# Altium PCB wificar.PcbDoc (part 1 of 3)
Units mil, origin at the board's own origin, x right, y up, seen from the top; angles counter-clockwise.
Board outline 3940.12 x 3943.17 mil, 2 copper layers (Top Layer, Bottom Layer); 89 components, 114 nets, 455 pads, 176 vias.
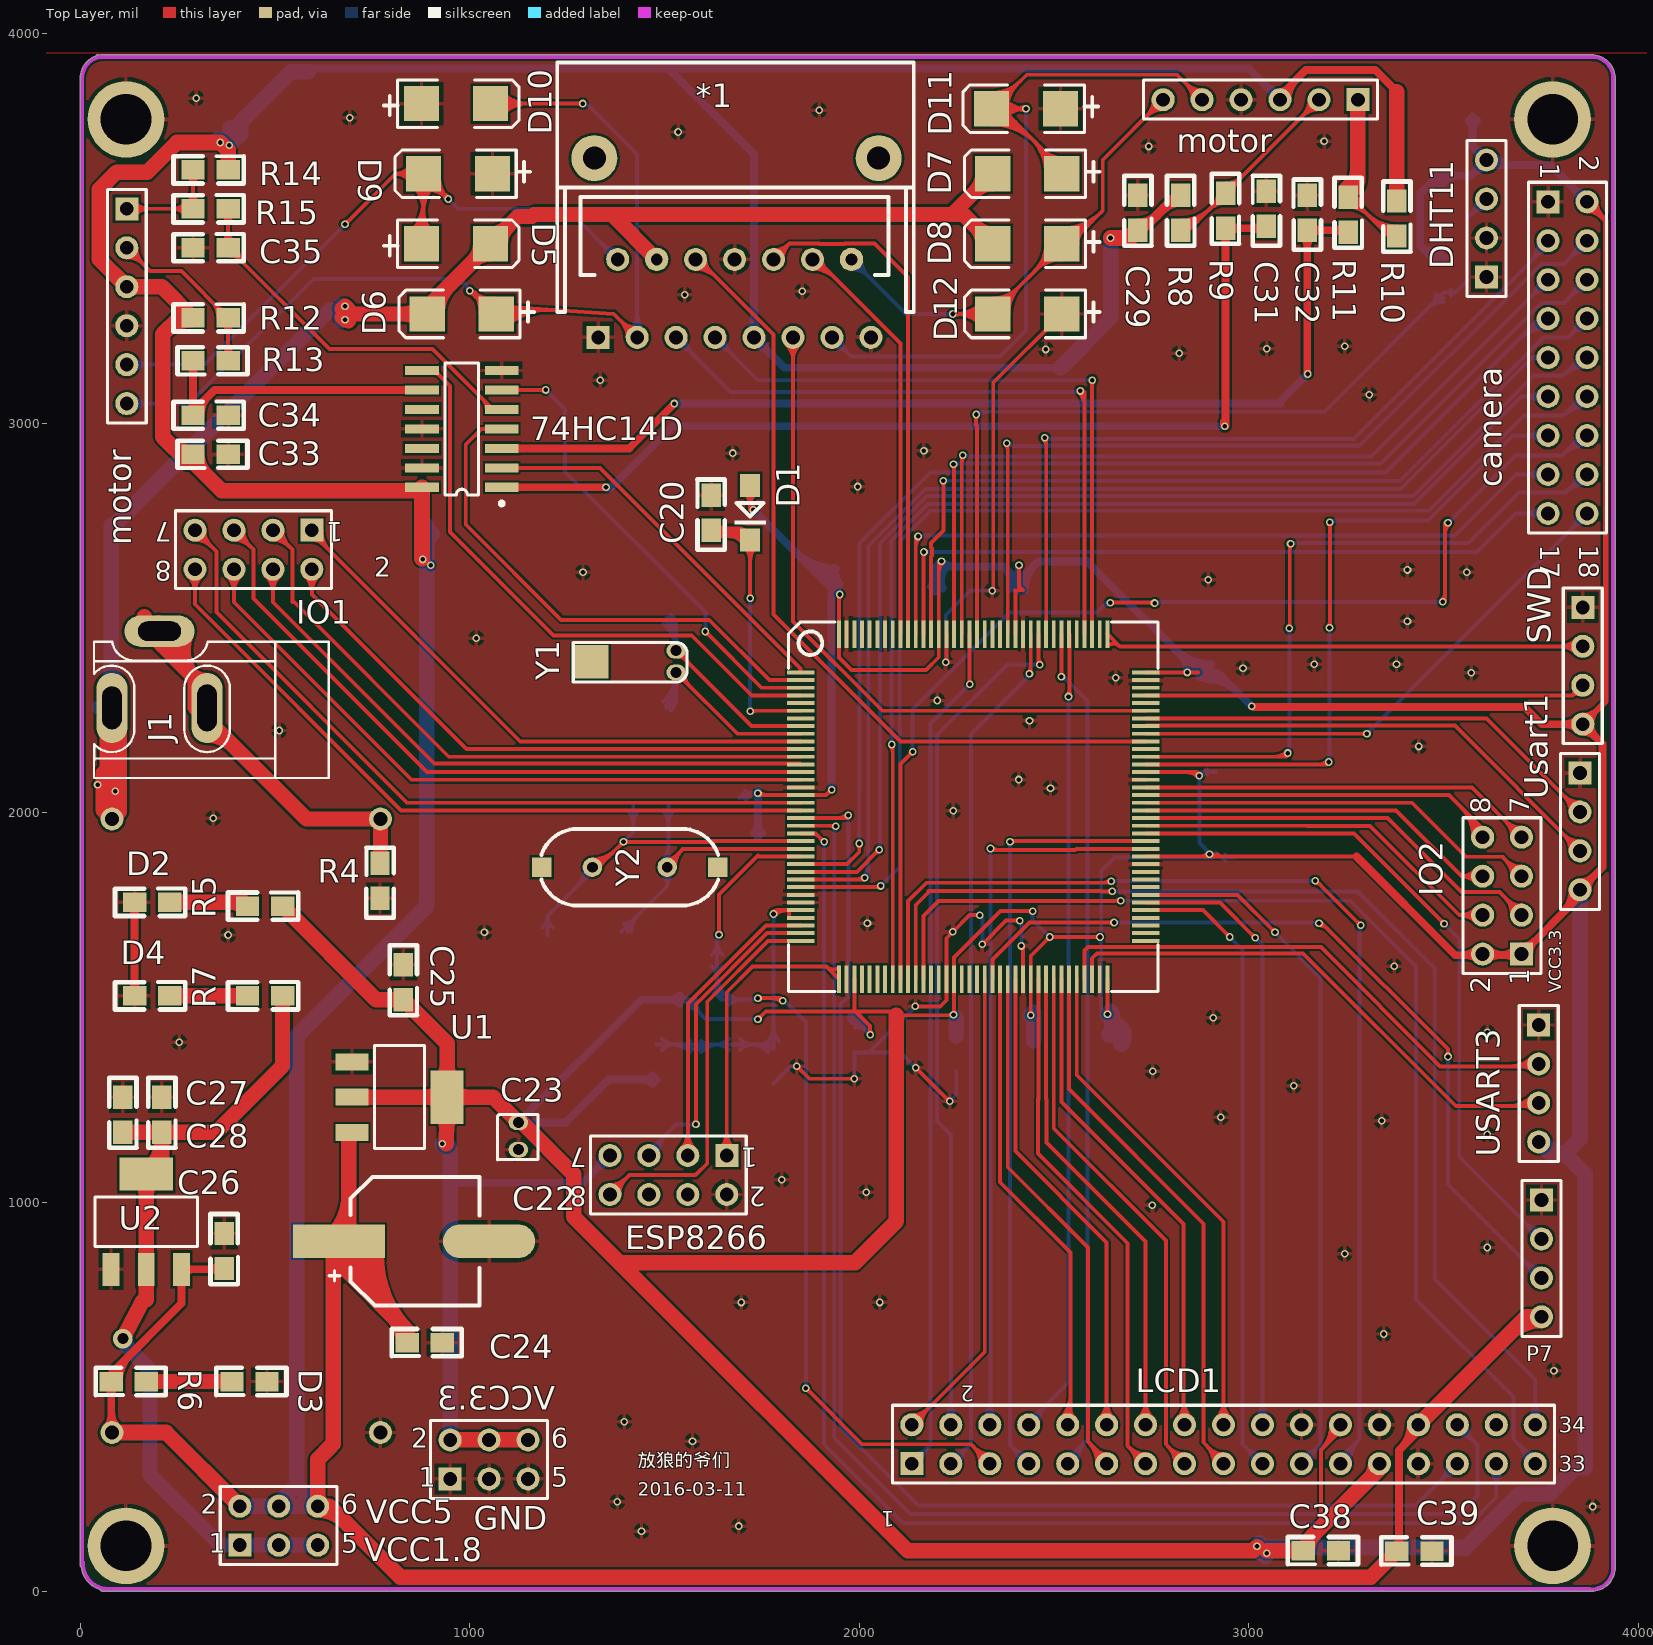
[diagram p0: Top Layer view]
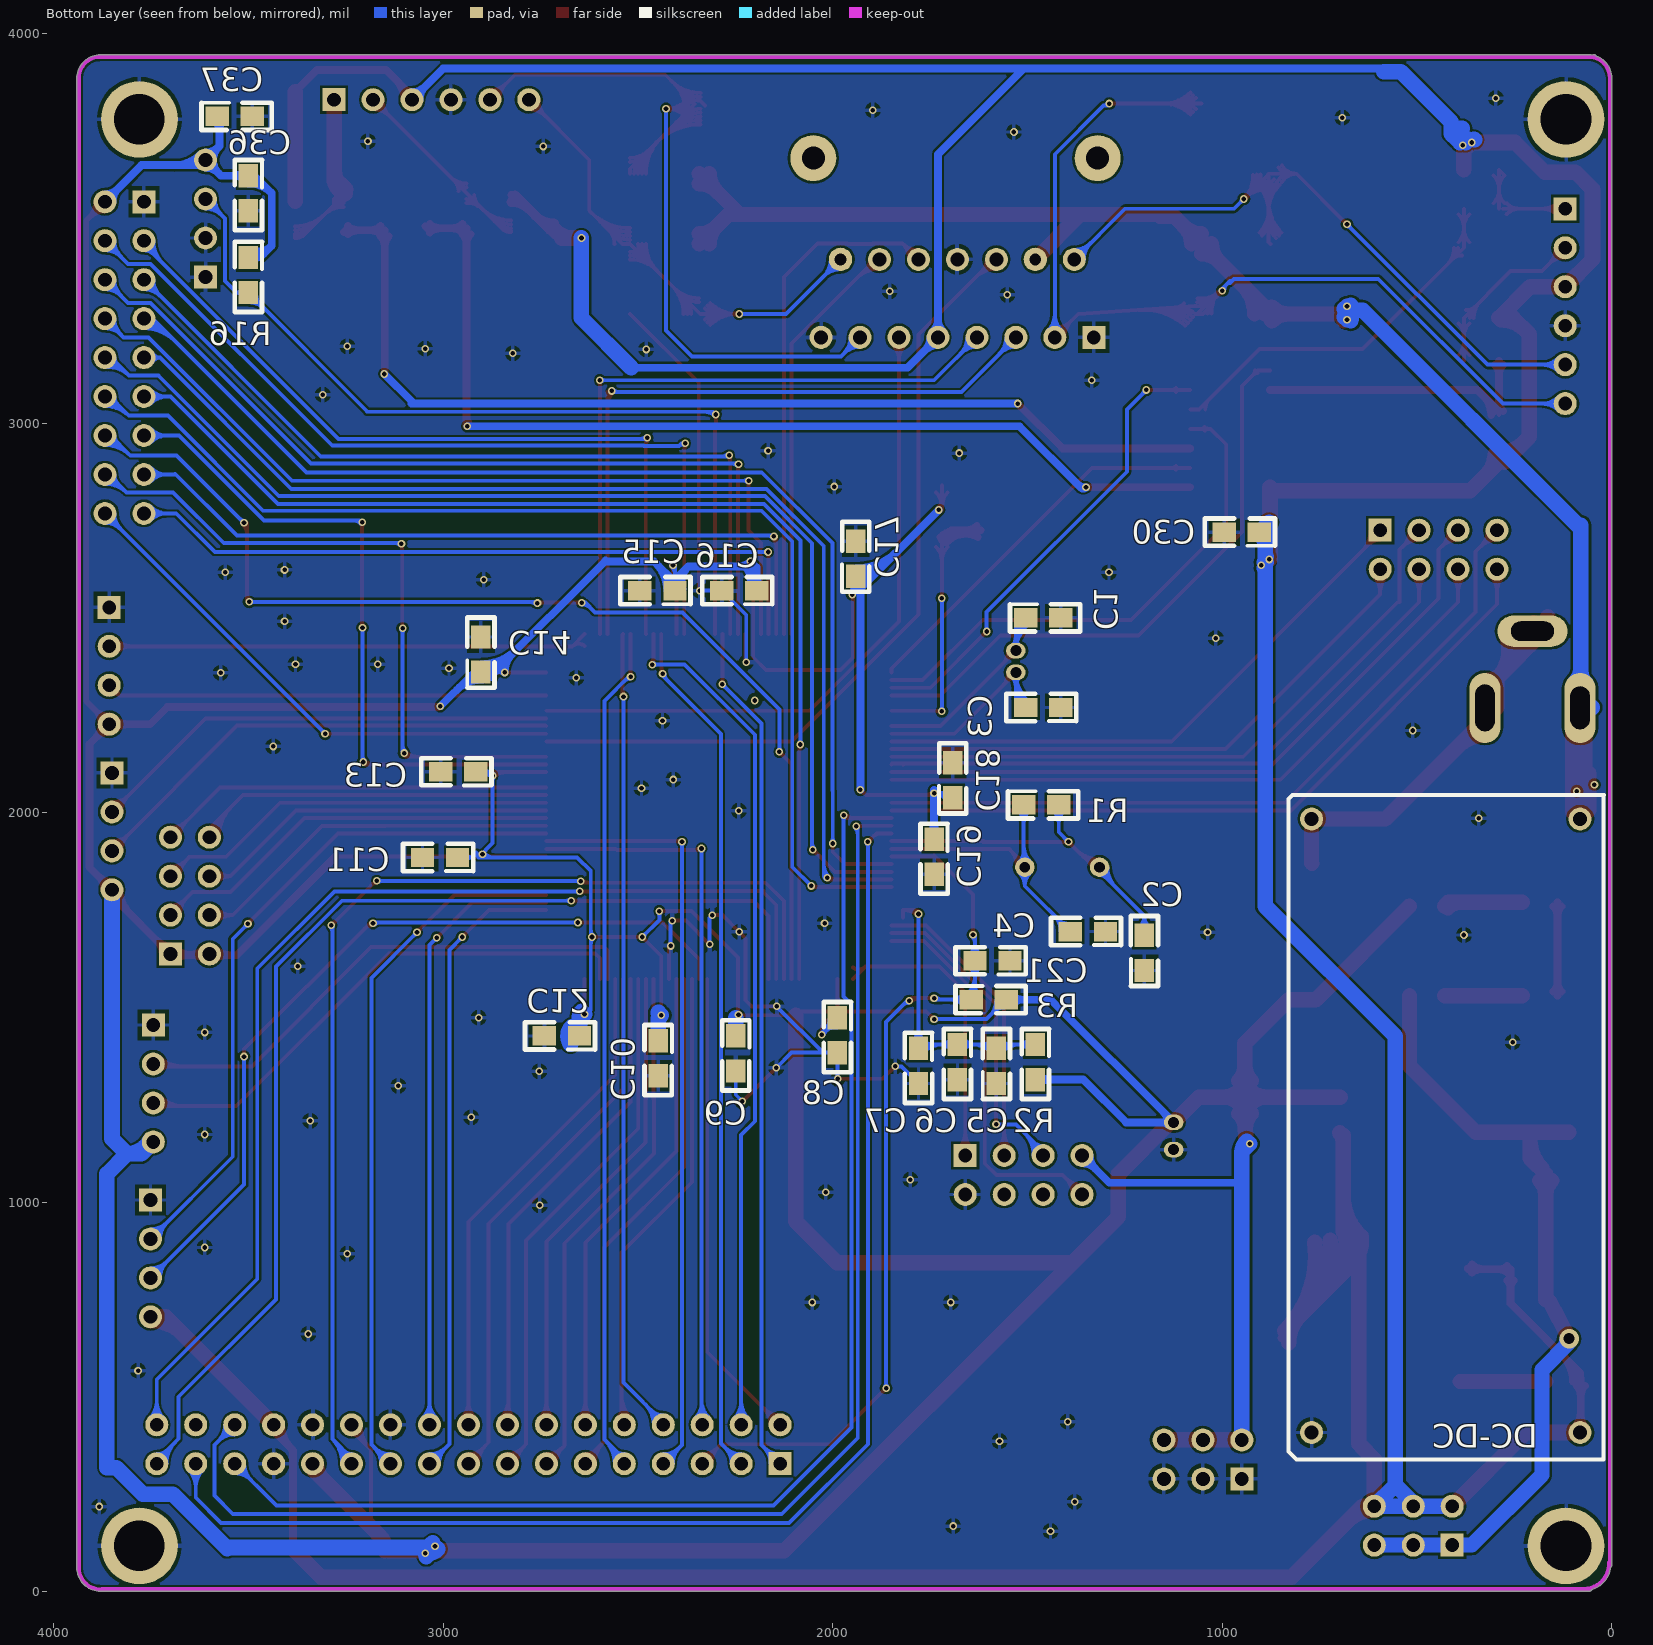
[diagram p1: Bottom Layer view, seen from below]

## Layer stack, top to bottom
Top Layer: signal copper 1.4
Dielectric: dielectric 12.6, FR-4, Dk 4.8
Bottom Layer: signal copper 1.4

## Board outline
-0.03,69 -0.03,3884.06 cw(c4.98,3884.06) 0.38,3886.05 cw(c60.46,3885.36) 40.39,3941.99 cw(c45,3940.02) 45,3945.03 46.4,3945.03 cw(c46.4,3940.02) 48.95,3944.33 cw(c60.46,3885.36) 53.1,3944.99 cw(c53.71,3940.02) 53.71,3945.03 3880,3945.03 cw(c3880,3884.94) 3940.09,3884.94 cw(c3935.07,3884.94) 3939.87,3883.49 cw(c3935.01,3882.27) 3940.02,3882.27 cw(c3935.01,3882.27) 3940.02,3882.27 cw(c3935.02,3882) 3940.03,3882 3940.03,61.86 cw(c3935.02,61.86) 3940.03,61.81 ccw(c3879.94,61.86) 3940.03,61.86 3940.03,61.81 cw(c3879.94,61.86) 3874.91,1.98 57,1.98 cw(c57,7) 52.09,5.98 cw(c71.42,71.78) 3.25,64.29 cw(c4.98,69)

## Design rules (kind name [scope] priority, off if disabled: settings)
Clearance [All] p1: gap=6
HoleSize [All] p1: absolutevalues=TRUE maxlimit=196.85 minlimit=0 maxpercent=80.000 minpercent=20.000
MinimumSolderMaskSliver [All] p1: minsoldermaskwidth=1
PolygonConnect [All] p1: connectstyle=Relief reliefconductorwidth=10 reliefentries=4 polygonreliefangle="90 Angle" airgapwidth=10
RoutingVias [All] p1: holewidth=11.81 width=19.68 viastyle="Through Hole" minholewidth=11.81 minwidth=19.68 maxholewidth=11.81 maxwidth=19.68
SilkToSilkClearance [All] p1: silktosilkclearance=0
SilkToSolderMaskClearance [IsPad] p1: minsilkscreentomaskgap=0 clearancetoexposedcopper=TRUE
SolderMaskExpansion [All] p1: expansion=4
Width Width_signal [All] p1: maxlimit=40 minlimit=6 preferedwidth=10
Width Width_12V [InNet('VCC_BT')] p2: maxlimit=40 minlimit=10 preferedwidth=20
Width Width_VCC3.3 [InNet('VCC3.3')] p3: maxlimit=20 minlimit=10 preferedwidth=15
Width Width_GND [InNet('GND')] p4: maxlimit=20 minlimit=10 preferedwidth=15
Width Width_VCC5 [InNet('VCC5')] p5: maxlimit=40 minlimit=10 preferedwidth=15
24 further rules are at their usual default settings.

## Classes and differential pairs
component class MotorDrive: 74HC14D *1 C29 C30 C31 C32 C33 C34 C35 D5 D6 D7 D8 D9 D10 D11 D12 motor R8 R9 R10 R11 R12 R13 R14 R15
component class MCUSTM32F4ZGT6: C1 C2 C3 C4 C5 C6 C7 C8 C9 C10 C11 C12 C13 C14 C15 C16 C17 C18 C19 C20 C21 D1 IO1 IO2 R1 R2 R3 SWD Usart1 USART3 Y1 Y2
component class BayPower: C22 C23 C24 C25 C26 C27 C28 D2 D3 D4 J1 R4 R5 R6 R7 U1 U2 VCC3.3 VCC5
component class baymaxother: C36 C37 C38 C39 camera DHT11 ESP8266 LCD1 P7 R16

## Components (designator, comment, footprint, x,y, rotation, side; value= is the part's Value field where it differs from the comment)
74HC14D "74HC14D" SO14-150 980,2985 r90 top (schematic designator U3)
*1 "L298N" L298N散热片 2060,3680 r270 top
C1 "10" "0805-bottom layer" 1500,2500 r180 top
C2 "22" "0805-bottom layer" 1200,1600 r90 top
C3 "10" "0805-bottom layer" 1420,2270 r0 top
C4 "22" "0805-bottom layer" 1305,1695 r0 top
C5 "225" "0805-bottom layer" 1580,1310 r90 top
C6 "104" "0805-bottom layer" 1680,1400 r270 top
C7 "10uF" "0805-bottom layer" 1780,1390 r270 top
C8 "104" "0805-bottom layer" 1988,1469 r270 top
C9 "104" "0805-bottom layer" 2249,1422 r270 top
C10 "104" "0805-bottom layer" 2448,1410 r270 top
C11 "104" "0805-bottom layer" 2968,1885 r0 top
C12 "104" "0805-bottom layer" 2655,1427 r0 top
C13 "104" "0805-bottom layer" 2921,2105 r0 top
C14 "104" "0805-bottom layer" 2903,2366 r90 top
C15 "104" "0805-bottom layer" 2410,2570 r0 top
C16 "104" "0805-bottom layer" 2200,2570 r0 top
C17 "104" "0805-bottom layer" 1941,2612 r90 top
C18 "104" "0805-bottom layer" 1692,2043 r90 top
C19 "104" "0805-bottom layer" 1740,1926.95 r270 top
C20 "104" "0805 - duplicate" 1620,2815 r270 top
C21 "104" "0805-bottom layer" 1550,1620 r0 top
C22 "220uF/35V" CAPPR-8.3X8.3-SM-F 860,900 r180 top
C23 "10uF/25V" 10UF/25v 1100,1200 r0 top
C24 "104" "0805 - duplicate" 840,640 r0 top
C25 "104" "0805 - duplicate" 830,1520 r90 top
C26 "104" "0805 - duplicate" 370,830 r90 top
C27 "104" "0805 - duplicate" 110,1180 r90 top
C28 "10uF" "0805 - duplicate" 210,1180 r90 top
C29 "0.1uF" "0805 - duplicate" 2715,3495 r90 top
C30 "0.1uF" "0805-bottom layer" 910,2720 r0 top
C31 "100pF" "0805 - duplicate" 3045,3595 r270 top
C32 "100pF" "0805 - duplicate" 3150,3585 r270 top
C33 "0.1uF" "0805 - duplicate" 290,2920 r0 top
C34 "100pF" "0805 - duplicate" 380,3020 r180 top
C35 "100pF" "0805 - duplicate" 380,3449.94 r180 top
C36 "104" "0805-bottom layer" 3500,3630 r270 top
C37 "104" "0805-bottom layer" 3575,3787 r180 top
C38 "104" "0805 - duplicate" 3140,106 r0 top
C39 "104" "0805 - duplicate" 3380,105 r0 top
camera "Header 9X2" HDR2X9 3768,3568 r270 top (schematic designator P8)
D1 "1N4148" DIODE_SOP 1720,2840 r270 top
D2 "LED-R" "0805 - duplicate" 230,1770 r180 top
D3 "LED-R" "0805 - duplicate" 390,540 r0 top
D4 "LED-R" "0805 - duplicate" 230,1530 r180 top
D5 "SS34" SMB 965,3460 r0 top
D6 "SS34" SMB 980,3280 r180 top
D7 "SS34" SMB 2431.42,3640 r180 top
D8 "SS34" SMB 2431.42,3460 r180 top
D9 "SS34" SMB 970,3640 r180 top
D10 "SS34" SMB 965,3820 r0 top
D11 "SS34" SMB 2428,3807 r180 top
D12 "SS34" SMB 2431.42,3280 r180 top
DHT11 "Header 4" HDR1X4 3610,3375 r90 top (schematic designator P4)
ESP8266 "Header 4X2" HDR2X4#1 1660,1120 r180 top (schematic designator P6)
IO1 "Header 4X2" HDR2X4#2 595,2725 r180 top (schematic designator P1)
IO2 "Header 4X2" HDR2X4#1 3700,1637 r90 top (schematic designator P2)
J1 "PWR" DC10B 501,2439 r180 top
LCD1 "TFT_LCD" HDR2X17 2135,329 r0 top
MCU1 "STM32F103ZET6" LQFP144 1850,2360 r0 top
motor "Moter_R" HDR1X6 120,3549.94 r270 top (schematic designator JP5)
motor "Motor_L" HDR1X6 3280,3830 r180 top (schematic designator JP4)
P7 "MHDR1X4" HDR1X4 3751,1006 r270 top
R1 "1M" "0805-bottom layer" 1505,2020 r180 top
R2 "10R" "0805-bottom layer" 1480,1400 r270 top
R3 "10K" "0805-bottom layer" 1640,1520 r180 top
R4 "1M" "0805 - duplicate" 770,1870 r270 top
R5 "470R" "0805 - duplicate" 520,1760 r180 top
R6 "470R" "0805 - duplicate" 80,540 r0 top
R7 "470R" "0805 - duplicate" 520,1530 r180 top
R8 "10K" "0805 - duplicate" 2825,3495 r90 top
R9 "240R" "0805 - duplicate" 2940,3500 r90 top
R10 "10K" "0805 - duplicate" 3380,3480 r90 top
R11 "240R" "0805 - duplicate" 3255,3490 r90 top
R12 "10K" "0805 - duplicate" 380,3270 r180 top
R13 "240R" "0805 - duplicate" 290,3160 r0 top
R14 "10K" "0805 - duplicate" 380,3649.94 r180 top
R15 "240R" "0805 - duplicate" 380,3549.94 r180 top
R16 "4.7K" "0805-bottom layer" 3500,3420 r270 top
SWD "SWD" HDR1X4 3857,2527 r270 top (schematic designator JP1)
U1 "AMS1117" SOT-223 820,1270 r270 top
U2 "AMS1117.1.8" SOT-223 170,950 r0 top
Usart1 "SWD" HDR1X4 3850,2102 r270 top (schematic designator JP3)
USART3 "Usart3" HDR1X4 3744,1455 r270 top (schematic designator JP2)
VCC3.3 "MHDR2X3" HDR2X3 950,290 r0 top (schematic designator PIO1)
VCC5 "MHDR2X3" HDR2X3 410,120 r0 top (schematic designator PIO2)
Y1 "32.768K" XTAL32 1530,2360 r180 top
Y2 "8MHZ" XTAL_US 1315,1860 r0 top

## Footprints (in the part's own frame and the unit in brackets; to place one, negate y for a bottom-side part, rotate by r counter-clockwise, add the part's x,y. Pads: shape width x height; smd on the part's side, far side on the other; paste and mask are expansions set on the pad)
10UF/25v [mil]
  oval 50x40 hole 28: 1(25,5) 2(25,-65)
  silkscreen extent -28,-91 75,25
"0805 - duplicate" [mil]
  rect 60x50 smd: 1(0,-0.06) 2(90,-0.06)
  silkscreen extent -40,-35 140,35
"0805-bottom layer" [mil]
  rect 60x50 smd far side: 1(-5,-0.06) 2(85,-0.06)
CAPPR-8.3X8.3-SM-F [mm]
  rect 6x2.2 smd: 1(4.953,0)
  oval 6x2.2 smd: 2(-4.826,0)
  silkscreen extent -4.2,-4.2 5.6,4.2, body extent -4.95,-4.19 4.95,4.11, height 10.2
DC10B [mil]
  oval 80x180 hole 50 slot 110 at 90 deg: 1(419.09,170)
  oval 80x180 hole 50 slot 120 at 90 deg: 2(175,170)
  oval 180x80 hole 50 slot 110 at 0 deg: 3(297.05,-26.85)
  silkscreen extent -138,0 465,350
DIODE_SOP [mm]
  rect 1.5x1.3 smd: 1(0,0) 2(3.556,0)
  silkscreen extent 1.14,-1.01 2.56,1.02
HDR1X4 [mm] "Connector; Header; 4 Position"
  rect 1.5x1.5 hole 0.9: 1(0,0)
  round 1.5 hole 0.9: 2(2.54,0) 3(5.08,0) 4(7.62,0)
  silkscreen extent -1.27,-1.27 8.89,1.27
HDR1X6 [mm]
  rect 1.5x1.5 hole 0.9: 1(0,0)
  round 1.5 hole 0.9: 2(2.54,0) 3(5.08,0) 4(7.62,0) 5(10.16,0) 6(12.7,0)
  silkscreen extent -1.27,-1.27 13.97,1.27
HDR2X3 [mm] "Connector; Header; 3x2 Position"
  rect 1.5x1.5 hole 0.9: 1(0,0)
  round 1.5 hole 0.9: 2(0,2.54) 3(2.54,0) 4(2.54,2.54) 5(5.08,0) 6(5.08,2.54)
  silkscreen extent -1.27,-1.27 6.35,3.81
HDR2X4#1 [mm] "Connector; Header; 4x2 Position"
  rect 1.5x1.5 hole 0.9: 1(0,0)
  round 1.5 hole 0.9: 2(0,2.54) 3(2.54,0) 4(2.54,2.54) 5(5.08,0) 6(5.08,2.54) 7(7.62,0) 8(7.62,2.54)
  silkscreen extent -1.27,-1.27 8.89,3.81
HDR2X4#2 [mm] "Connector; Header; 4x2 Position"
  rect 1.5x1.5 hole 0.9: 1(0,0)
  round 1.5 hole 0.9 paste+0: 2(0,2.54)
  round 1.5 hole 0.9: 3(2.54,0) 4(2.54,2.54) 5(5.08,0) 6(5.08,2.54) 7(7.62,0) 8(7.62,2.54)
  silkscreen extent -1.27,-1.27 8.89,3.81
HDR2X9 [mm] "Connector; Header; 9x2 Position"
  rect 1.5x1.5 hole 0.9: 1(0,0)
  round 1.5 hole 0.9: 2(0,2.54) 3(2.54,0) 4(2.54,2.54) 5(5.08,0) 6(5.08,2.54) 7(7.62,0) 8(7.62,2.54) 9(10.16,0) 10(10.16,2.54) 11(12.7,0) 12(12.7,2.54) 13(15.24,0) 14(15.24,2.54) 15(17.78,0) 16(17.78,2.54) 17(20.32,0) 18(20.32,2.54)
  silkscreen extent -1.27,-1.27 21.59,3.81
HDR2X17 [mm] "Connector; Header; 17x2 Position"
  rect 1.5x1.5 hole 0.9: 1(0,0)
  round 1.5 hole 0.9: 2(0,2.54) 3(2.54,0) 4(2.54,2.54) 5(5.08,0) 6(5.08,2.54) 7(7.62,0) 8(7.62,2.54) 9(10.16,0) 10(10.16,2.54) 11(12.7,0) 12(12.7,2.54) 13(15.24,0) 14(15.24,2.54) 15(17.78,0) 16(17.78,2.54) 17(20.32,0) 18(20.32,2.54) 19(22.86,0) 20(22.86,2.54) 21(25.4,0) 22(25.4,2.54) 23(27.94,0) 24(27.94,2.54) 25(30.48,0) 26(30.48,2.54) 27(33.02,0) 28(33.02,2.54) 29(35.56,0) 30(35.56,2.54) 31(38.1,0) 32(38.1,2.54) 33(40.64,0) 34(40.64,2.54)
  silkscreen extent -1.27,-1.27 41.91,3.81
L298N散热片 [mm]
  round 3 hole 1.5: 0(0,-0.254) 0(0,-18.796)
  rect 1.5x1.5 hole 0.9: 1(11.684,-18.542)
  round 1.5 hole 0.9: 2(6.604,-17.272) 3(11.684,-16.002) 5(11.684,-13.462) 6(6.604,-12.192) 7(11.684,-10.922) 8(6.604,-9.652) 9(11.684,-8.382) 10(6.604,-7.112) 11(11.684,-5.842) 12(6.604,-4.572) 13(11.684,-3.302) 15(11.684,-0.762)
  round 1.524 hole 0.762: 4(6.604,-14.732) 14(6.604,-2.032)
  silkscreen extent -6.22,-21.21 10.03,2.03
LQFP144 [mil]
  rect 70.87x10 smd: 1(-0.35,0.02) 2(-0.35,-19.66) 3(-0.35,-39.35) 4(-0.35,-59.03) 5(-0.35,-78.72) 6(-0.35,-98.4) 7(-0.35,-118.09) 8(-0.35,-137.77) 9(-0.35,-157.46) 10(-0.35,-177.14) 11(-0.35,-196.83) 12(-0.35,-216.51) 13(-0.35,-236.2) 14(-0.35,-255.88) 15(-0.35,-275.57) 16(-0.35,-295.25) 17(-0.35,-314.94) 18(-0.35,-334.62) 19(-0.35,-354.31) 20(-0.35,-373.99) 21(-0.35,-393.68) 22(-0.35,-413.36) 23(-0.35,-433.05) 24(-0.35,-452.73) 25(-0.35,-472.42) 26(-0.35,-492.1) 27(-0.35,-511.79) 28(-0.35,-531.47) 29(-0.35,-551.16) 30(-0.35,-570.84) 31(-0.35,-590.53) 32(-0.35,-610.21) 33(-0.35,-629.9) 34(-0.35,-649.58) 35(-0.35,-669.27) 36(-0.35,-688.95) 73(885.47,-688.95) 74(885.47,-669.27) 75(885.47,-649.58) 76(885.47,-629.9) 77(885.47,-610.21) 78(885.47,-590.53) 79(885.47,-570.84) 80(885.47,-551.16) 81(885.47,-531.47) 82(885.47,-511.79) 83(885.47,-492.1) 84(885.47,-472.42) 85(885.47,-452.73) 86(885.47,-433.05) 87(885.47,-413.36) 88(885.47,-393.68) 89(885.47,-373.99) 90(885.47,-354.31) 91(885.47,-334.62) 92(885.47,-314.94) 93(885.47,-295.25) 94(885.47,-275.57) 95(885.47,-255.88) 96(885.47,-236.2) 97(885.47,-216.51) 98(885.47,-196.83) 99(885.47,-177.14) 100(885.47,-157.46) 101(885.47,-137.77) 102(885.47,-118.09) 103(885.47,-98.4) 104(885.47,-78.72) 105(885.47,-59.03) 106(885.47,-39.35) 107(885.47,-19.66) 108(885.47,0.02)
  rect 10x70.87 smd: 37(98.07,-787.38) 38(117.76,-787.38) 39(137.44,-787.38) 40(157.13,-787.38) 41(176.81,-787.38) 42(196.5,-787.38) 43(216.18,-787.38) 44(235.87,-787.38) 45(255.55,-787.38) 46(275.24,-787.38) 47(294.92,-787.38) 48(314.61,-787.38) 49(334.29,-787.38) 50(353.98,-787.38) 51(373.66,-787.38) 52(393.35,-787.38) 53(413.03,-787.38) 54(432.72,-787.38) 55(452.4,-787.38) 56(472.09,-787.38) 57(491.77,-787.38) 58(511.46,-787.38) 59(531.14,-787.38) 60(550.83,-787.38) 61(570.51,-787.38) 62(590.2,-787.38) 63(609.88,-787.38) 64(629.57,-787.38) 65(649.25,-787.38) 66(668.94,-787.38) 67(688.62,-787.38) 68(708.31,-787.38) 69(727.99,-787.38) 70(747.68,-787.38) 71(767.36,-787.38) 72(787.05,-787.38) 109(787.05,98.45) 110(767.36,98.45) 111(747.68,98.45) 112(727.99,98.45) 113(708.31,98.45) 114(688.62,98.45) 115(668.94,98.45) 116(649.25,98.45) 117(629.57,98.45) 118(609.88,98.45) 119(590.2,98.45) 120(570.51,98.45) 121(550.83,98.45) 122(531.14,98.45) 123(511.46,98.45) 124(491.77,98.45) 125(472.09,98.45) 126(452.4,98.45) 127(432.72,98.45) 128(413.03,98.45) 129(393.35,98.45) 130(373.66,98.45) 131(353.98,98.45) 132(334.29,98.45) 133(314.61,98.45) 134(294.92,98.45) 135(275.24,98.45) 136(255.55,98.45) 137(235.87,98.45) 138(216.18,98.45) 139(196.5,98.45) 140(176.81,98.45) 141(157.13,98.45) 142(137.44,98.45) 143(117.76,98.45) 144(98.07,98.45)
  silkscreen extent -32,-819 917,130
SMB [mm] "DO-214-AA/SMB; 2 C-Bend Leads; Body 5.3 x 3.6 mm, inc. leads (LxW)"
  rect 2.3x2.3 smd: 1(-2.25,0) 2(2.25,0)
  silkscreen extent -4.7,-1.55 4.1,1.55
SO14-150 [mm]
  rect 0.6x2.2 smd: 1(-3.81,-2.6) 2(-2.54,-2.6) 3(-1.27,-2.6) 4(0,-2.6) 5(1.27,-2.6) 6(2.54,-2.6) 7(3.81,-2.6) 8(3.81,2.6) 9(2.54,2.6) 10(1.27,2.6) 11(0,2.6) 12(-1.27,2.6) 13(-2.54,2.6) 14(-3.81,2.6)
  silkscreen extent -4.98,-2.73 4.3,1.1, body extent -4.32,-3.05 4.32,3.05, height 1.75
SOT-223 [mm]
  rect 1.1x2.15 smd: 1(-2.3,-3.1) 2(0,-3.1) 3(2.3,-3.1)
  rect 3.5x2.15 smd: 4(0,3.1)
  silkscreen extent -3.35,-1.62 3.35,1.62, body extent -3.15,-3.3 3.15,3.3, height 1.8
XTAL32 [mil]
  oval 50x40 hole 28: 1(0,0) 2(0,-56)
  rect 92.13x86 smd: ""(220,-27)
  silkscreen extent -28,-77 264,25
XTAL_US [mil]
  round 50 hole 28: 1(0,0) 2(192.13,0)
  rect 50x50 smd: ""(-130.32,0) ""(322.44,0)
  silkscreen extent -131,-98 323,98

## Part data
74HC14D: "Hex inverting Schmitt trigger"
C1 C2 C3 C4 C5 C6 C7 C8 C9 C10 C11 C12 C13 C14 C15 C16 C17 C18 C19 C20 C21 C24 C25 C26 C27 C28 C36 C37: "电容"
C22: library part CAP-ELEC, "Polarized Capacitor"
C23: library part CAP-ELEC_2, "Polarized Capacitor"
C29 C30 C31 C32 C33 C34 C35: library part CAP, "Capacitor"
C38 C39: library part C
camera: "Header, 9-Pin, Dual row"
D1: "限流二极管"
D2 D3 D4: library part LED, "Light Emitting Diode"
D5 D6 D7 D8 D9 D10 D11 D12: library part DIODE-SBD, "Schottky barrier rectifier"
DHT11 P7: "Header, 4-Pin"
ESP8266 IO1 IO2: "Header, 4-Pin, Dual row"
motor motor: library part "HEADER 6"
R1 R2 R3 R4 R16: "电阻"
R5 R6 R7 R8 R9 R10 R11 R12 R13 R14 R15: library part RES, "Resistor"
SWD Usart1 USART3: library part "HEADER 4"
U1: "800mA Low-Dropout Linear Regulator"
U2: "电压转换"
VCC3.3 VCC5: "Header, 3-Pin, Dual row"
Y1 Y2: "晶振"

## Free pads (board coordinates)
  round 59.06 hole 35.43: 0(81.97,1983.86) 1(770.94,1983.86) 2(81.97,409.06) 3(770.94,409.06)
  round 196.85 hole 129.92: 0(118.11,118.11) 1(118.11,3779.53) 3(3779.53,118.11) 4(3779.53,3779.53)

## Via types
v1: diameter 19.68, hole 11.81, Top Layer to Bottom Layer, 175 vias
v2: diameter 50, hole 28, Top Layer to Bottom Layer, 1 vias

## Nets (pads, with @x,y where several pads share a name; then routed paths per layer and width w, separated by ;. In a path a pad name is that pad's centre, name@x,y a point inside that pad or via, vN(x,y) a via of type N, cw(c..) or ccw(c..) an arc to the next point about the centre after c; other vN are vias at no path point)
GND: 74HC14D.7 74HC14D.11 74HC14D.13 *1.1 *1.8 *1.15 C1.2 C2.1 C3.1 C4.1 C5.1 C6.2 C7.2 C8.2 C9.2 C10.2 C11.2 C12.2 C13.2 C14.2 C15.2 C16.2 C17.2 C18.2 C19.2 C20.1 C21.1 C22.2 C23.2 C24.2 C25.2 C26.2 C27.2 C28.2 C29.2 C30.2 C31.1 C32.1 C33.2 C34.1 C35.2 C36.2 C37.2 C38.2 C39.2 camera.1 D2.2 D3.2 D4.2 D9.1 D10.1 D11.1 D12.1 DHT11.1 DHT11.2 ESP8266.2 LCD1.22 LCD1.26 LCD1.27 MCU1.16 MCU1.30 MCU1.31 MCU1.38 MCU1.51 MCU1.61 MCU1.71 MCU1.83 MCU1.94 MCU1.107 MCU1.120 MCU1.130 MCU1.138 MCU1.143 motor.4 P7.1 pad.0@118.11,118.11 pad.1@118.11,3779.53 pad.3 pad.4 R4.2 SWD.1 U1.1 U2.1 Usart1.1 USART3.1 VCC3.3.1 VCC3.3.3 VCC3.3.5 | length 3040.3
  Top Layer w10: v1(1840,1349) 1872,1317 v1(1987,1317) ; v1(2144,1503) 2208,1503 2223.66,1518.66 MCU1.51@2223.66,1572.62 2223.66,1677.66 v1(2240,1694) 2283,1737 v1(2309,1737) ; v1(2145,1345) 2146,1345 v1(2232,1259) ; v1(2222,2386) 2223.66,2387.66 MCU1.130@2223.66,2458.45 ; v1(2316,1662) 2377,1723 v1(2412,1723) ; v1(2341,2570) 2344,2573 2344,3104 D12.1@2520,3280 ; v1(2416,1658) 2420.51,1653.49 MCU1.61@2420.51,1572.62
  Top Layer w20: D4.2@129.39,1540.67 ccw(c103.79,1566.28) 140,1566.28 ccw(c176.21,1566.28) D4.2@150.61,1540.67 ; D2.2@129.39,1759.46 cw(c103.79,1733.85) 140,1733.85 cw(c176.21,1733.85) D2.2@150.61,1759.46 ; D4.2@140,1530.06 D2.2@140,1770.06
  Bottom Layer w10: C7.2@1779.94,1305 1823.94,1349 v1(1840,1349) ; v1(1987,1317) 1987.94,1317.94 C8.2@1987.94,1384 2025,1384 ; v1(2144,1503) 2025,1384 ; v1(2145,1345) 2106,1384 2025,1384 ; v1(2222,2386) 2222,2506.94 C16.2@2285,2569.94 2337.94,2569.94 2338,2570 v1(2341,2570) ; v1(2232,1259) 2248.94,1275.94 C9.2@2248.94,1337 ; v1(2309,1737) 2316,1730 v1(2316,1662) ; v1(2412,1723) 2416,1719 v1(2416,1658)
  other v1: 1441,156 1691,169 3883,219 1379,231 1572,387 1397,437 3783,568 3346,662 1697,743 2053,743 3246,868 3612,884 2752,992 2018,1026 1801,1058 3612,1174 3341,1209 2928,1218 3115,1299 2753,1336 255,1411 3612,1436 2909,1474 3373,1606 380,1686 1038,1693 2021,1716 342,1986 2241,2005 2491,2063 2409,2085 3436,2170 511,2211 2437,2236 2200,2288 2658,2346 3571,2359 2985,2371 3168,2381 3379,2381 1017,2448 3407,2491 2896,2598 1291,2617 3559,2617 3407,2623 1996,2837 1675,2923 2166,2929 3309,3073 1335,3110 2821,3179 2479,3189 3046,3191 3246,3197 1552,3329 1854,3338 2743,3710 3193,3723 1535,3747 692,3784 1897,3803 298,3834
GND_BT: J1.2 J1.3 pad.1@770.94,1983.86 R4.1 | length 1487.3
  Top Layer w39: J1.3@165.02,2503.3 ccw(c194.85,2490.74) J1.3@171.96,2467.84 ; J1.3@172.95,2466.85 295,2344.8 ; J1.3@200.96,2488.16 ccw(c252.57,2466.43) J1.3@212.97,2426.83 ; J1.3@236.9,2473.03 ccw(c310.29,2442.13) 253.98,2385.82 ; J1.3@272.85,2457.89 ccw(c368.01,2417.82) 295,2344.81 ; 282.13,2357.67 ccw(c326,2401.54) J1.2@326,2339.5 ; 294.68,2345.12 cw(c268.56,2319) J1.2@305.5,2319 ; J1.2@305.5,2319.16 ccw(c269.65,2319.45) 295,2344.8 ; J1.2@319.98,2338.59 cw(c312.64,2362.44) 295,2344.8 ; J1.2@326,2198.5 cw(c326,2100.72) 395.14,2169.86 ; R4.1@769.94,1870 770.94,1871.01 pad.1@770.94,1983.86 581.14,1983.86 295,2270 295,2344.8
Net*1_2: *1.2 D5.1 D9.2 motor.5@120,3149.94 | length 3234.4
  Top Layer w10: v1(680,3510) 810,3640 ; v1@680,3514.84 ccw(c680,3526.53) 688.27,3518.27 ccw(c696.53,3510) v1@684.84,3510 ; D9.2@846.95,3619.16 ccw(c810,3596.82) 810,3640 ; D9.2@846.95,3660.84 cw(c810,3683.18) 810,3640 ; D5.1@847.94,3488.48 ccw(c767.11,3569.31) 881.42,3569.31 ; D9.2@852.94,3611.52 cw(c784.18,3542.77) 881.42,3542.77 cw(c978.65,3542.77) D9.2@909.9,3611.52 ; D5.1@855.01,3481.41 ccw(c791.26,3545.16) 881.42,3545.16 ccw(c961.58,3545.16) D5.1@904.9,3488.48 ; D9.2@855.51,3624.34 ccw(c827.73,3607.54) 827.73,3640 ccw(c827.73,3672.46) D9.2@855.51,3655.66 ; D9.2@860.01,3618.59 cw(c808.33,3566.91) 881.42,3566.91 cw(c954.51,3566.91) D9.2@902.83,3618.59 ; D5.1@862.08,3474.34 ccw(c815.4,3521.02) 881.42,3521.02 ccw(c937.44,3521.02) D5.1@897.83,3481.41 ; D9.2@867.08,3625.66 cw(c832.47,3591.05) 881.42,3591.05 cw(c930.37,3591.05) D9.2@895.76,3625.66 ; D5.1@876.42,3460 881.42,3465 D9.2@881.42,3635 ; D9.2@882.33,3609.74 cw(c884.22,3546.97) 928.63,3591.37 ; D9.2@882.63,3599.74 cw(c885.18,3515.19) v1(945,3575) ; D9.2@901.65,3638.64 ccw(c943.53,3635.83) D9.2@913.85,3606.15 ; D9.2@911.63,3637.97 ccw(c972.72,3633.87) 929.42,3590.58 ; D9.2@921.6,3637.3 ccw(c1001.91,3631.92) v1(945,3575) ; 939.15,3585.12 cw(c929.03,3579.28) v1@940.32,3576.25 ; 939.15,3585.13 ccw(c949.28,3590.97) v1@946.25,3579.68 ; v1@940.16,3575 ccw(c928.47,3575) 936.73,3583.27 ccw(c945,3591.53) v1@945,3579.84 ; v1@940.32,3573.77 ccw(c929,3570.8) 934.9,3580.9 ccw(c940.8,3590.99) v1@943.77,3579.68 ; 810,3640 D9.2@881.42,3640 881.42,3638.58 v1(945,3575)
  Bottom Layer w10: motor.5@120,3149.94 319.94,3149.94 v1(680,3510) ; motor.5@130.27,3139.66 cw(c155.07,3114.86) 155.07,3149.94 cw(c155.07,3185.01) motor.5@130.27,3160.21 ; motor.5@137.34,3132.59 cw(c179.21,3090.72) 179.21,3149.94 cw(c179.21,3209.15) motor.5@137.34,3167.28 ; v1@675.16,3510 cw(c663.47,3510) 671.73,3501.73 cw(c680,3493.47) v1@680,3505.16 ; v1@945,3570.16 cw(c945,3558.47) 953.27,3566.73 cw(c961.53,3575) v1@949.84,3575 ; v1(945,3575) 970,3550 1250,3550 *1.2@1380,3420 ; *1.2@1355.47,3420 ccw(c1296.26,3420) 1338.13,3461.87 ccw(c1380,3503.74) *1.2@1380,3444.53 ; *1.2@1365.47,3420 ccw(c1330.4,3420) 1355.2,3444.8 ccw(c1380,3469.6) *1.2@1380,3434.53
Net*1_3: *1.3 D6.1 D10.2 motor.6@120,3049.94 | length 4112
  Top Layer w10: v1@998.87,3335.29 cw(c992.75,3309.77) 1015.13,3323.49 ; v1@1000,3335.16 cw(c1000,3311.4) 1016.8,3328.2 ; v1(1000,3340) v1@1005,3340 ; v1@1001.25,3335.32 cw(c1006.49,3315.79) 1016.6,3333.3 ; 1019.44,3325.56 ccw(c1057.96,3364.08) D6.1@1064.79,3310.04 ; 1021.37,3323.63 cw(c980.4,3282.65) D6.1@1038.32,3280.91 ; D6.1@1028.32,3281.21 ccw(c948.61,3283.61) v1@1005,3340 ; D6.1@1033.87,3311.13 ccw(c1061.2,3338.46) D6.1@1066.04,3300.12 ; D6.1@1040,3300 1030,3300 1050,3280 1065,3280 v1@1005,3340 ; D10.2@1053.58,3820 v1(1290,3820) ; D6.1@1063.53,3319.96 cw(c1054.72,3389.71) v1@1005,3340 ; D10.2@1067.92,3805.66 cw(c1102.53,3771.05) 1102.53,3820 cw(c1102.53,3868.95) D10.2@1067.92,3834.34 ; D6.1@1068.76,3279.79 cw(c1114.08,3228.03) 1118.64,3296.68 ; D6.1@1070,3300 1068.58,3300 1370,3280 *1.3@1430,3220 ; D10.2@1074.99,3798.59 cw(c1126.67,3746.91) 1126.67,3820 cw(c1126.67,3893.09) D10.2@1074.99,3841.41 ; D6.1@1075.35,3272.27 cw(c1136.58,3202.34) 1142.73,3295.08 ; D6.1@1081.94,3264.75 cw(c1159.07,3176.65) 1166.82,3293.48 ; D10.2@1082.06,3791.52 cw(c1150.82,3722.77) 1150.82,3820 cw(c1150.82,3917.23) D10.2@1082.06,3848.48 ; D6.1@1088.53,3257.22 cw(c1181.56,3150.97) 1190.91,3291.88 ; D6.1@1095.11,3249.7 cw(c1204.05,3125.28) 1215,3290.28 ; D6.1@1098.88,3306.53 ccw(c1120.78,3325.7) 1118.85,3296.66 ; v1@1286.58,3816.58 ccw(c1278.31,3808.31) 1278.31,3820 ccw(c1278.31,3831.69) v1@1286.58,3823.42 ; *1.3@1405.47,3220 ccw(c1346.26,3220) 1388.13,3261.87 ccw(c1430,3303.74) *1.3@1430,3244.53 ; *1.3@1415.47,3220 ccw(c1380.4,3220) 1405.2,3244.8 ccw(c1430,3269.6) *1.3@1430,3234.53
  Bottom Layer w10: motor.6@120,3049.94 279.94,3049.94 600,3370 970,3370 980,3360 ; motor.6@130.27,3039.66 cw(c155.07,3014.86) 155.07,3049.94 cw(c155.07,3085.01) motor.6@130.27,3060.21 ; motor.6@137.34,3032.59 cw(c179.21,2990.72) 179.21,3049.94 cw(c179.21,3109.15) motor.6@137.34,3067.28 ; 975,3365 980,3365 1005,3340 v1(1000,3340) ; 988.2,3356.8 cw(c971.4,3340) v1@995.16,3340 ; v1(1290,3820) 1295,3815 1305,3815 ; v1@1294.44,3821.93 ccw(c1305,3826.51) 1305,3815 ; *1.3@1412.66,3237.34 ccw(c1370.79,3279.21) 1430,3279.21 ccw(c1489.21,3279.21) *1.3@1447.34,3237.34 ; *1.3@1419.73,3230.27 ccw(c1394.93,3255.07) 1430,3255.07 ccw(c1465.07,3255.07) *1.3@1440.27,3230.27 ; *1.3@1430,3220 1430,3690 1305,3815
Net*1_5: *1.5 MCU1.112 | length 1963.5
  Top Layer w10: v1@2564.08,3079.08 cw(c2530.48,3045.48) 2577.99,3045.48 ; v1(2567.5,3082.5) 2565,3080 2577.99,3080 ; v1@2571.15,3086.15 cw(c2554.62,3069.62) 2577.99,3069.62 ; v1@2572.05,3084.16 ccw(c2577.99,3086.32) 2577.99,3080 ; MCU1.112@2577.99,2458.45 2577.99,3080
  Bottom Layer w10: *1.5@1530,3195.47 cw(c1530,3136.26) 1571.87,3178.13 cw(c1613.74,3220) *1.5@1554.53,3220 ; *1.5@1530,3205.47 cw(c1530,3170.4) 1554.8,3195.2 cw(c1579.6,3220) *1.5@1544.53,3220 ; *1.5@1530,3220 1670,3080 v1@2570,3080 ; 2549.77,3080 ccw(c2549.77,3100.23) v1@2564.08,3085.92
Net*1_6: *1.6 MCU1.99 | length 2223.1
  Top Layer w10: *1.6@1580,3395.47 cw(c1580,3318.6) 1634.36,3372.96 ; *1.6@1580,3405.47 cw(c1580,3352.74) 1617.29,3390.03 ; *1.6@1580,3420 1587.31,3420 1780,3227.31 1780,2509 2106.14,2182.86 MCU1.99@2735.47,2182.86 ; *1.6@1604.53,3420 ccw(c1646.08,3420) 1616.7,3390.62
Net*1_7: *1.7 MCU1.111 | length 1849.6
  Top Layer w10: v1@2594.25,3106.58 cw(c2585.99,3098.31) 2597.68,3098.31 cw(c2609.37,3098.31) v1@2601.1,3106.58 ; MCU1.111@2597.68,2458.45 v1(2597.68,3110)
  Bottom Layer w10: *1.7@1630,3195.47 cw(c1630,3136.26) 1671.87,3178.13 cw(c1713.74,3220) *1.7@1654.53,3220 ; *1.7@1630,3205.47 cw(c1630,3170.4) 1654.8,3195.2 cw(c1679.6,3220) *1.7@1644.53,3220 ; *1.7@1630,3220 1740,3110 v1(2597.68,3110) ; v1@2594.25,3106.58 ccw(c2585.99,3098.31) 2585.99,3110 ccw(c2585.99,3121.69) v1@2594.25,3113.42
Net*1_10: *1.10 MCU1.135 | length 1455.6
  Top Layer w10: *1.10@1780,3420 1820.53,3460.53 ; *1.10@1780.34,3434.52 ccw(c1781.1,3466.91) 1804,3444 ccw(c1826.91,3421.1) *1.10@1794.52,3420.34 ; *1.10@1780.57,3444.52 ccw(c1781.85,3499.2) 1820.53,3460.53 ; *1.10@1804.52,3420.57 cw(c1859.2,3421.85) 1820.53,3460.53 ; MCU1.135@2125.24,2458.45 2125.24,3374.76 2039,3461 1963.02,3461 1962.02,3460 1897.31,3460 1896.79,3460.53 1820.53,3460.53
Net*1_11: *1.11 MCU1.103 | length 1877.6
  Top Layer w10: *1.11@1812.66,3202.66 cw(c1770.79,3160.79) 1830,3160.79 cw(c1889.21,3160.79) *1.11@1847.34,3202.66 ; *1.11@1819.73,3209.73 cw(c1794.93,3184.93) 1830,3184.93 cw(c1865.07,3184.93) *1.11@1840.27,3209.73 ; *1.11@1830,3220 1830,2491 2059.4,2261.6 MCU1.103@2735.47,2261.6
Net*1_12: *1.12 MCU1.136 | length 1200.4
  Top Layer w10: *1.12@1880,3395.47 cw(c1880,3312.12) 1938.94,3371.06 ; *1.12@1880,3405.47 cw(c1880,3346.26) 1921.87,3388.13 ; *1.12@1880,3420 1890,3420 2105.55,3204.45 MCU1.136@2105.55,2458.45 ; *1.12@1904.53,3420 ccw(c1939.6,3420) 1914.8,3395.2
Net*1_13: *1.13 D7.1 D11.2 motor.5@2880,3830 | length 3785.4
  Top Layer w10: D11.2@2327.84,3815 D11.2@2342.84,3830 ; D11.2@2339.42,3766.72 cw(c2339.42,3605.71) 2453.27,3719.56 ; D11.2@2339.42,3776.72 cw(c2339.42,3639.85) 2436.2,3736.64 ; D11.2@2339.42,3786.72 cw(c2339.42,3674) 2419.13,3753.71 ; D11.2@2339.42,3796.72 cw(c2339.42,3708.14) 2402.06,3770.78 ; D11.2@2339.42,3806.72 cw(c2339.42,3742.28) 2384.99,3787.85 ; D11.2@2339.42,3827.28 ccw(c2339.42,3884.87) D11.2@2380.15,3844.15 ; D11.2@2339.42,3837.28 ccw(c2339.42,3919.02) 2397.22,3861.22 ; D11.2@2339.42,3847.28 ccw(c2339.42,3953.16) 2414.29,3878.29 ; D11.2@2362.23,3787.1 cw(c2406,3748.92) 2406,3807 cw(c2406,3865.08) D11.2@2362.23,3826.9 ; D11.2@2369.69,3807 cw(c2434.14,3807) 2388.57,3852.57 ; D11.2@2369.77,3780.52 cw(c2428,3729.73) v1(2428,3807) ; D11.2@2369.77,3833.48 ccw(c2428,3884.27) v1(2428,3807) ; 2389.49,3783.34 cw(c2413.15,3807) 2379.69,3807 cw(c2468.28,3807) 2405.64,3869.64 ; v1@2423.81,3804.57 ccw(c2413.69,3798.72) 2416.71,3810.01 ccw(c2419.72,3821.31) v1@2425.57,3811.19 ; v1@2423.81,3809.43 cw(c2413.69,3815.28) 2416.71,3803.99 cw(c2419.72,3792.69) v1@2425.57,3802.81 ; v1@2424.58,3803.58 ccw(c2416.31,3795.31) 2416.31,3807 ccw(c2416.31,3818.69) v1@2424.58,3810.42 ; 2442.17,3730.67 cw(c2351.5,3640) D7.1@2479.72,3640 ; 2459.24,3713.6 cw(c2385.64,3640) D7.1@2489.72,3640 ; 2473.16,3699.68 ccw(c2520,3746.52) D7.1@2520,3680.28 ; 2476.31,3696.53 cw(c2419.79,3640) D7.1@2499.72,3640 ; D7.1@2490.23,3682.61 ccw(c2520,3712.38) D7.1@2520,3670.28 ; D7.1@2493.38,3679.45 cw(c2453.93,3640) D7.1@2509.72,3640 ; D7.1@2520,3640 2520,3652.84 D11.2@2365.84,3807 ; motor.5@2855.47,3830 ccw(c2796.26,3830) 2838.13,3871.87 ccw(c2880,3913.74) motor.5@2880,3854.53 ; motor.5@2865.47,3830 ccw(c2830.4,3830) 2855.2,3854.8 ccw(c2880,3879.6) motor.5@2880,3844.53 ; motor.5@2880,3830 2816,3894 2430,3894 2354.42,3818.42 D11.2@2365.84,3807 ; D11.2@2365.84,3807 v1(2428,3807)
  Bottom Layer w10: *1.13@1930,3195.47 cw(c1930,3136.26) 1971.87,3178.13 cw(c2013.74,3220) *1.13@1954.53,3220 ; *1.13@1930,3205.47 cw(c1930,3170.4) 1954.8,3195.2 cw(c1979.6,3220) *1.13@1944.53,3220 ; *1.13@1930,3220 1979,3171 2361,3171 2428,3238 v1(2428,3807) ; v1@2424.58,3803.58 cw(c2416.31,3795.31) 2428,3795.31 cw(c2439.69,3795.31) v1@2431.42,3803.58
Net*1_14: *1.14 D8.1 D12.2 motor.6@2780,3830 | length 2904.2
  Top Layer w10: v1(2240,3280) 2340,3280 D8.1@2520,3460 2540,3460 2625,3545 2625,3675 motor.6@2780,3830 ; v1@2242.77,3276.03 cw(c2251.37,3263.67) 2254.03,3278.49 ; v1@2242.77,3283.97 ccw(c2251.37,3296.33) 2254.03,3281.51 ; v1@2243.42,3276.58 cw(c2251.69,3268.31) 2251.69,3280 cw(c2251.69,3291.69) v1@2243.42,3283.42 ; D12.2@2314.36,3251.52 ccw(c2245.6,3182.77) 2245.6,3280 ccw(c2245.6,3377.23) D12.2@2314.36,3308.48 ; D12.2@2321.43,3258.59 ccw(c2269.74,3206.91) 2269.74,3280 ccw(c2269.74,3353.09) D12.2@2321.43,3301.41 ; D12.2@2328.5,3265.66 ccw(c2293.89,3231.05) 2293.89,3280 ccw(c2293.89,3328.95) D12.2@2328.5,3294.34 ; D12.2@2342.84,3310.28 ccw(c2342.84,3376.52) 2389.68,3329.68 ; D12.2@2342.84,3320.28 ccw(c2342.84,3410.66) 2406.75,3346.75 ; D12.2@2363.11,3280 cw(c2418.91,3280) D12.2@2379.45,3319.45 ; D12.2@2373.11,3280 cw(c2453.05,3280) 2396.53,3336.53 ; D12.2@2383.11,3280 cw(c2487.19,3280) 2413.6,3353.6 ; D8.1@2479.72,3460 cw(c2382.49,3460) 2451.25,3391.25 cw(c2520,3322.49) D8.1@2520,3419.72 ; D8.1@2489.72,3460 cw(c2416.63,3460) 2468.32,3408.32 cw(c2520,3356.63) D8.1@2520,3429.72 ; D8.1@2499.72,3460 cw(c2450.77,3460) 2485.39,3425.39 cw(c2520,3390.77) D8.1@2520,3439.72 ; D8.1@2520,3470.28 ccw(c2520,3543.37) 2571.68,3491.68 ; D8.1@2520,3480.28 ccw(c2520,3577.51) 2588.75,3508.75 ; D8.1@2520,3490.28 ccw(c2520,3611.65) 2605.83,3525.83 ; D8.1@2520,3500.28 ccw(c2520,3645.79) 2622.9,3542.9 ; D8.1@2560.28,3460 cw(c2609.23,3460) 2574.61,3494.61 ; motor.6@2755.47,3830 cw(c2696.26,3830) 2738.13,3788.13 cw(c2780,3746.26) motor.6@2780,3805.47 ; motor.6@2765.47,3830 cw(c2730.4,3830) 2755.2,3805.2 cw(c2780,3780.4) motor.6@2780,3815.47
  Bottom Layer w10: *1.14@1980,3395 cw(c1980,3334.64) 2022.68,3377.32 cw(c2065.36,3420) *1.14@2005,3420 ; *1.14@1980,3405 cw(c1980,3368.79) 2005.61,3394.39 cw(c2031.21,3420) *1.14@1995,3420 ; *1.14@1980,3420 2120,3280 v1(2240,3280) ; v1@2236.58,3276.58 ccw(c2228.31,3268.31) 2228.31,3280 ccw(c2228.31,3291.69) v1@2236.58,3283.42
NetC1_1: C1.1 MCU1.8 Y1.2 | length 855.4
  Top Layer w10: Y1.2@1530,2416 1723.77,2222.23 MCU1.8@1849.65,2222.23 ; Y1.2@1535,2401 cw(c1535,2376.86) 1552.07,2393.93 ; Y1.2@1540,2416 ccw(c1564.14,2416) 1547.07,2398.93 ; Y1.2@1550,2416 ccw(c1598.28,2416) 1564.14,2381.86
  Bottom Layer w10: C1.1@1497.06,2484.81 cw(c1436.68,2413.66) Y1.2@1530,2413.66 ; C1.1@1503.53,2492.44 cw(c1455.01,2435.26) Y1.2@1530,2435.26 ; C1.1@1505,2500.06 1530,2475.06 Y1.2@1530,2416 ; C1.1@1510,2500.06 cw(c1473.34,2456.86) 1530,2456.86 ; C1.1@1516.47,2507.69 cw(c1491.67,2478.46) C1.1@1530,2478.46 ; Y1.2@1519.39,2426.61 ccw(c1493.79,2452.21) 1530,2452.21 ccw(c1566.21,2452.21) Y1.2@1540.61,2426.61
NetC2_2: C2.2 MCU1.23 R1.2 Y2.1 | length 1358.8
  Top Layer w10: Y2.1@1315,1870 ccw(c1315,1930.36) 1357.68,1887.68 ; Y2.1@1315,1880 ccw(c1315,1964.5) 1374.75,1904.75 ; Y2.1@1335,1860 cw(c1347.07,1860) 1338.54,1868.54 ; 1340.61,1870.61 cw(c1315,1896.21) Y2.1@1315,1860 1330,1860 v1(1395,1925) 1615,1925 1613.05,1926.95 MCU1.23@1849.65,1926.95 ; v1@1390.16,1925 cw(c1378.47,1925) 1386.73,1916.73 cw(c1395,1908.47) v1@1395,1920.16 ; v1@1398.42,1921.58 cw(c1406.69,1913.31) 1406.69,1925 cw(c1406.69,1936.69) v1@1398.42,1928.42
  Bottom Layer w10: C2.2@1186.65,1704.83 ccw(c1159.3,1735.06) 1200.06,1735.06 ; C2.2@1200.06,1685 1200.06,1735.06 ; C2.2@1213.48,1704.83 cw(c1240.83,1735.06) 1200.06,1735.06 ; 1273.79,1808.79 ccw(c1222.57,1860) Y2.1@1295,1860 ; 1290.86,1825.86 ccw(c1256.72,1860) Y2.1@1305,1860 ; 1297.93,1832.93 cw(c1315,1815.86) Y2.1@1315,1840 ; Y2.1@1315,1860 1315,1850 1200.06,1735.06 ; v1(1395,1925) 1420,1950 R1.2@1420,2020.06 ; v1@1395,1929.84 ccw(c1395,1941.53) 1403.27,1933.27 ccw(c1411.53,1925) v1@1399.84,1925 ; R1.2@1405.86,2005.92 cw(c1371.72,1971.78) 1420,1971.78 cw(c1468.28,1971.78) R1.2@1434.14,2005.92
NetC3_2: C3.2 MCU1.9 Y1.1 | length 855
  Top Layer w10: Y1.1@1530,2360 1687.46,2202.54 MCU1.9@1849.65,2202.54 ; Y1.1@1535,2345 cw(c1535,2320.86) 1552.07,2337.93 ; Y1.1@1540,2360 ccw(c1564.14,2360) 1547.07,2342.93 ; Y1.1@1550,2360 ccw(c1598.28,2360) 1564.14,2325.86
  Bottom Layer w10: C3.2@1496.59,2284.77 ccw(c1428.62,2360) Y1.1@1530,2360 1530,2294.94 C3.2@1505,2269.94 ; C3.2@1503.3,2277.36 ccw(c1448.96,2337.48) 1530,2337.48 ; C3.2@1510,2269.94 ccw(c1469.31,2314.97) 1530,2314.97 ; C3.2@1516.7,2262.52 ccw(c1489.65,2292.45) C3.2@1530,2292.45 ; Y1.1@1519.39,2349.39 cw(c1493.79,2323.79) 1530,2323.79 cw(c1566.21,2323.79) Y1.1@1540.61,2349.39
NetC4_2: C4.2 MCU1.24 R1.1 Y2.2 | length 1210
  Top Layer w10: Y2.2@1507.13,1880 ccw(c1507.13,1911.08) 1529.1,1889.1 ; Y2.2@1510,1860 1510,1870 1547.27,1907.27 MCU1.24@1849.65,1907.27 ; Y2.2@1517.13,1860 cw(c1558.47,1860) 1529.24,1889.24 ; Y2.2@1527.13,1860 cw(c1592.61,1860) 1546.31,1906.31
  Bottom Layer w10: C4.2@1390,1694.94 1507.13,1812.06 ; C4.2@1395,1714.94 ccw(c1395,1751.15) 1420.61,1725.54 ; C4.2@1405,1694.94 cw(c1441.21,1694.94) 1415.61,1720.54 ; C4.2@1415,1694.94 cw(c1475.36,1694.94) 1432.68,1737.61 ; Y2.2@1492.98,1874.14 ccw(c1451.9,1915.22) 1510,1915.22 ; Y2.2@1493.06,1845.79 cw(c1459.68,1812.07) 1507.13,1812.07 ; R1.1@1495.86,2005.92 cw(c1461.72,1971.78) 1510,1971.78 cw(c1558.28,1971.78) R1.1@1524.14,2005.92 ; Y2.2@1500.05,1867.07 ccw(c1476.05,1891.08) 1510,1891.08 ; Y2.2@1510,1837.87 1507.13,1835 ; 1510,1901.35 ccw(c1548.47,1901.35) Y2.2@1521.27,1874.14 ; R1.1@1510,2020.06 1510,1862.87 Y2.2@1507.13,1860 1507.13,1835 ; Y2.2@1521.2,1845.79 ccw(c1554.57,1812.07) 1507.13,1812.07 ; 1507.13,1812.06 1507.13,1835
NetC5_2: C5.2 C6.1 C7.1 MCU1.32 MCU1.33 R2.1 | length 1476.6
  Top Layer w10: v1(1780,1740) 1789.79,1749.79 1820,1750 MCU1.33@1820,1730.32 ; v1@1780,1744.84 ccw(c1780,1756.53) 1788.27,1748.27 ccw(c1796.53,1740) v1@1784.84,1740 ; v1@1776.33,1743.62 cw(c1791.09,1729.06) 1790.94,1749.8 ccw(c1791.09,1729.06) v1@1776.33,1743.62 ; v1@1783.45,1736.6 cw(c1815.4,1705.09) 1815.09,1749.97 ccw(c1815.4,1705.09) v1@1783.45,1736.6
  Bottom Layer w10: R2.1@1479.94,1405 C7.1@1779.94,1405 ; R2.1@1494.08,1390.86 cw(c1528.22,1356.72) 1528.22,1405 cw(c1528.22,1453.28) R2.1@1494.08,1419.14 ; 1519.71,1405 cw(c1519.71,1339.64) C5.2@1565.92,1385.86 ; C5.2@1565.92,1414.14 cw(c1543.85,1436.21) 1543.85,1405 cw(c1543.85,1363.79) C5.2@1572.99,1392.93 ; C5.2@1587.14,1392.93 cw(c1616.28,1363.79) 1616.28,1405 cw(c1616.28,1436.21) C5.2@1594.21,1414.14 ; C5.2@1594.21,1385.86 cw(c1640.42,1339.64) 1640.42,1405 ; C6.1@1665.79,1390.86 ccw(c1631.65,1356.72) 1631.65,1405 ccw(c1631.65,1453.28) C6.1@1665.79,1419.14 ; C6.1@1694.08,1390.86 cw(c1728.22,1356.72) 1728.22,1405 cw(c1728.22,1453.28) C6.1@1694.08,1419.14 ; 1719.58,1405 cw(c1719.58,1339.64) C7.1@1765.79,1385.86 ; C7.1@1772.86,1392.93 ccw(c1743.72,1363.79) 1743.72,1405 ccw(c1743.72,1436.21) 1765.79,1414.14 ccw(c1731.65,1448.28) 1779.94,1448.28 ccw(c1828.22,1448.28) C7.1@1794.08,1414.14 ; v1@1776.58,1736.58 cw(c1768.46,1728.46) 1779.94,1728.46 ; C7.1@1779.94,1395 C7.1@1779.94,1405 ; 1779.94,1728.15 cw(c1791.85,1728.15) v1@1783.42,1736.58 ; v1(1780,1740) 1779.94,1739.94 C7.1@1779.94,1405
NetC31_2: 74HC14D.1 C31.2 R9.1 | length 2785.3
  Top Layer w20: 74HC14D.1@1082.36,2835 v1(1350,2835) ; R9.1@2929.46,3484.39 cw(c2903.85,3458.79) 2940.06,3458.79 cw(c2976.28,3458.79) R9.1@2950.67,3484.39 ; v1@2940,2992 2940,3009 ; R9.1@2950.67,3489.39 cw(c2976.28,3463.79) 2976.28,3500 cw(c2976.28,3536.21) R9.1@2950.67,3510.61 ; 3008.72,3500 cw(c3008.72,3463.78) C31.2@3034.33,3489.39 ; 3008.73,3500 ccw(c3008.73,3536.21) C31.2@3034.33,3510.61 ; C31.2@3044.94,3505 3039.94,3500 R9.1@2940.06,3500 2940.06,3009.06 ; 2940,3009 ccw(c2949.91,2999.09) 2937.86,2991.92 cw(c2950.06,2999.07) 2940.06,3009.06 ; 2940,3009 2940.06,3009.06
  Bottom Layer w20: v1@1349.89,2834.89 ccw(c1356.89,2842.11) 1364,2835 ; v1@1350,2834.84 ccw(c1350,2868.26) 1373.63,2844.63 ; v1(1350,2835) 1364,2835 ; v1(2938,2992) 1521,2992 1364,2835